# Altium PCB PCB_Testplatine.PcbDoc (part 2 of 3)
Units mm, origin at the board's own origin, x right, y up, seen from the top; angles counter-clockwise.
Board outline 124.77 x 137.35 mm, 2 copper layers (Top Layer, Bottom Layer); 215 components, 185 nets, 1105 pads, 469 vias.
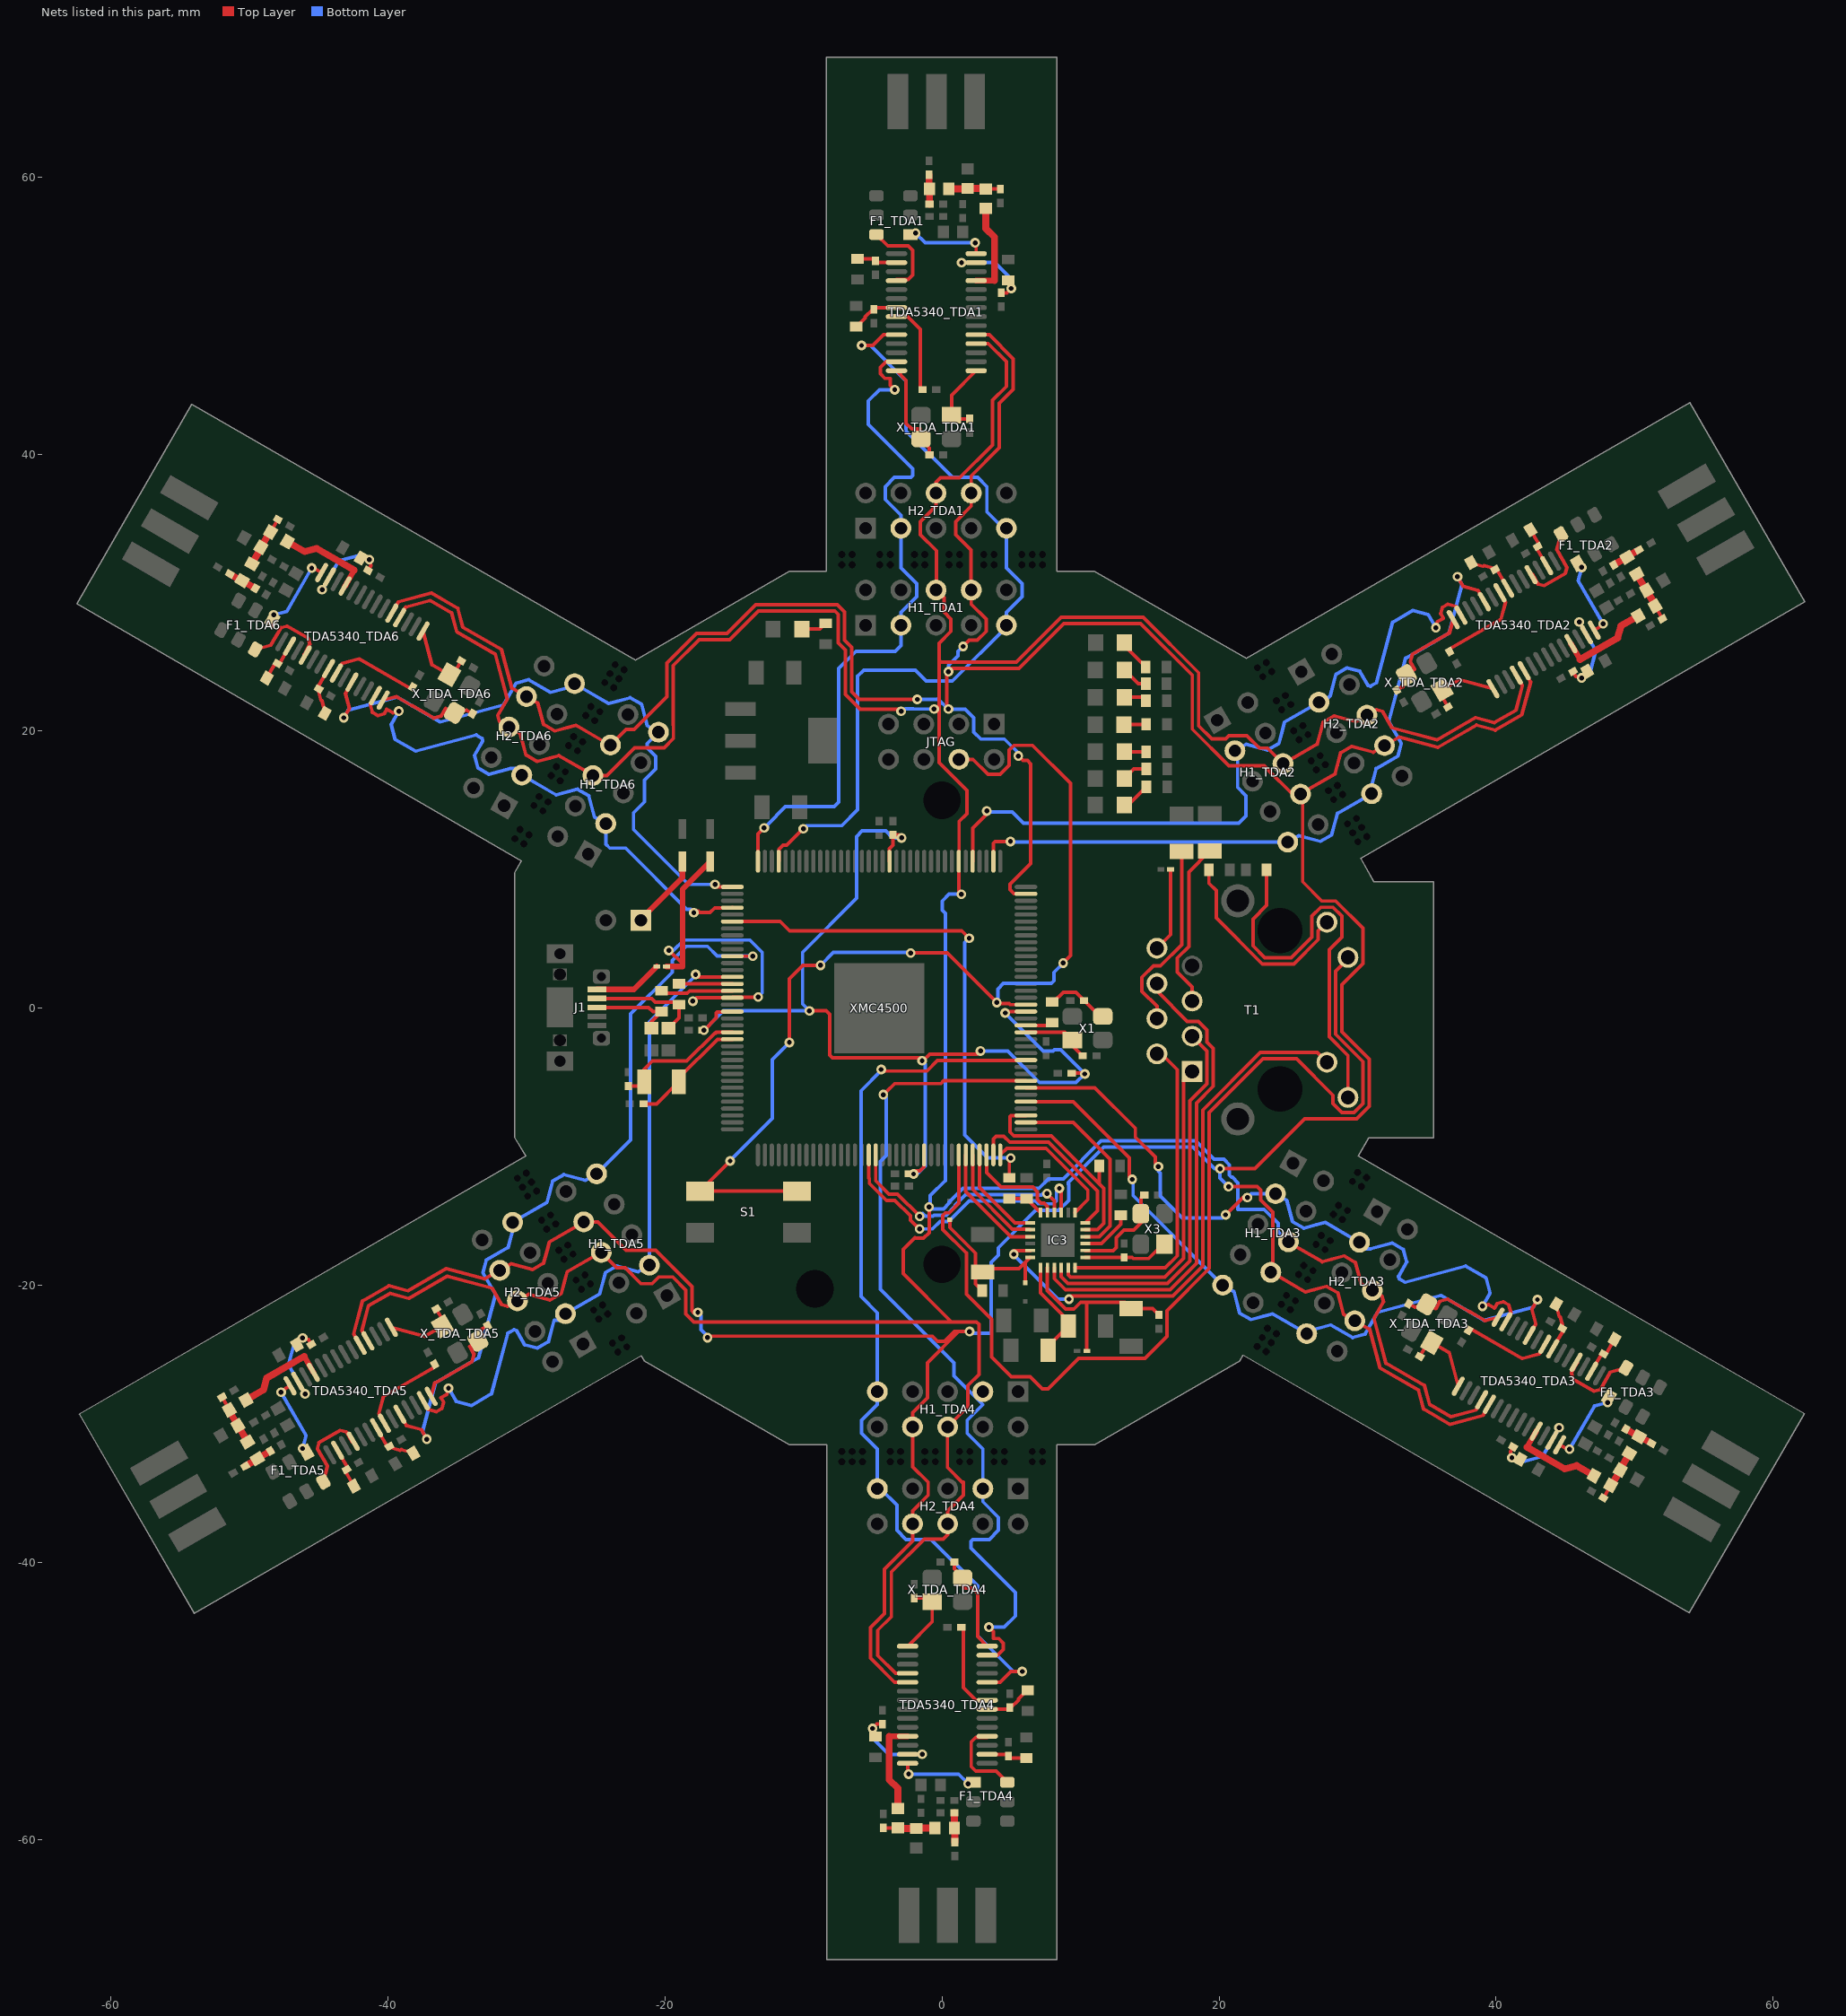
[diagram p2: the nets of this part, all layers, seen from the top]

## Via types
v1: diameter 0.7, hole 0.35, Top Layer to Bottom Layer, 421 vias
v2: diameter 0.5, hole 0.35, Top Layer to Bottom Layer, 36 vias
v3: diameter 2.7, hole 2.5, Top Layer to Bottom Layer, 12 vias

## Nets (pads, with @x,y where several pads share a name; then routed paths per layer and width w, separated by ;. In a path a pad name is that pad's centre, name@x,y a point inside that pad or via, vN(x,y) a via of type N, cw(c..) or ccw(c..) an arc to the next point about the centre after c; other vN are vias at no path point) (continued)
INTRP: R206.2 XMC4500.6 | length 37.5
  Top Layer w0.254: XMC4500.6@-15.15,6.25 -11.697,6.25 -11.017,5.57 1.42,5.57 v1(1.95,5.04) ; R206.2@4.85,-12.25 4.85,-10.92 v1(4.95,-10.82)
  Bottom Layer w0.254: v1(1.95,5.04) 1.641,4.731 1.641,-9.151 3.29,-10.8 4.776,-10.8 4.853,-10.723 v1(4.95,-10.82)
LED1: T1.11 XMC4500.66 | length 75.9
  Top Layer w0.254: XMC4500.66@1.2,-10.6 1.2,-14.091 0.515,-14.776 0.24,-14.776 0.048,-14.968 0.048,-15.982 1.753,-17.687 1.753,-20.643 3.573,-22.463 3.573,-25.185 5.001,-26.613 6.365,-26.613 7.242,-27.49 7.652,-27.49 9.865,-25.277 14.635,-25.277 16.227,-23.685 16.227,-21.846 19.284,-18.789 19.284,-7.548 23.168,-3.664 25.594,-3.664 28.223,-6.293 28.223,-6.896 28.854,-7.527 29.746,-7.527 30.377,-6.896 30.377,-3.86 28.404,-1.887 28.404,2.65 29.3,3.546 T1.11@29.3,3.66
MISO_TDA1: H1_TDA1.8 H1_TDA2.8 H1_TDA3.8 H1_TDA4.8 H1_TDA5.8 H1_TDA6.8 H2_TDA1.8 H2_TDA2.8 H2_TDA3.8 H2_TDA4.8 H2_TDA5.8 H2_TDA6.8 TDA5340_TDA1.19 TDA5340_TDA2.19 TDA5340_TDA3.19 TDA5340_TDA4.19 TDA5340_TDA5.19 TDA5340_TDA6.19 XMC4500.107 | length 353.1
  Top Layer w0.254: TDA5340_TDA5.19@-42.022,-24.341 -42.493,-23.526 -41.857,-21.151 -39.942,-20.045 -38.576,-20.411 -35.792,-18.804 -33.012,-19.549 H2_TDA5.8@-31.942,-18.931 -31.127,-18.461 -29.582,-18.875 -28.771,-18.406 -28.528,-17.501 -28.364,-16.888 H1_TDA5.8@-25.887,-15.458 ; TDA5340_TDA6.19@-39.737,28.515 -39.267,29.331 -36.892,29.967 -34.977,28.861 -34.611,27.495 -31.827,25.888 -31.082,23.108 H2_TDA6.8@-30.012,22.49 -29.197,22.02 -28.783,20.475 -27.972,20.007 -27.067,20.249 -26.454,20.413 H1_TDA6.8@-23.977,18.983 ; H1_TDA5.8@-25.88,-15.431 -24.863,-15.431 -22.81,-17.483 -20.694,-17.483 -18.064,-20.113 -18.064,-21.86 -17.955,-21.97 v1(-17.64,-21.97) ; H1_TDA6.8@-23.95,18.99 -22.827,20.113 -22.234,20.113 -19.864,22.483 -19.864,24.918 -17.726,27.056 -16.737,27.056 -16.729,27.048 -15.525,27.048 -13.454,29.119 -7.557,29.119 -7.051,28.613 -7.051,26.567 -6.519,26.034 -6.519,22.829 -5.98,22.29 v1(-1.8,22.29) ; v1(-16.94,-23.79) -16.83,-23.68 -0.707,-23.68 -0.33,-24.057 0.17,-24.057 0.877,-23.35 1.19,-23.35 ; TDA5340_TDA4.19@-2.495,-48.665 -3.437,-48.665 -5.175,-46.927 -5.175,-44.715 -4.175,-43.715 -4.175,-40.501 -2.14,-38.466 -2.14,-36.289 -1.009,-35.158 -1.009,-34.222 -2.12,-33.111 H1_TDA4.8@-2.12,-30.25 ; H1_TDA4.8@-2.14,-30.23 -2.14,-29.213 -1.063,-28.136 -1.063,-25.603 1.19,-23.35 ; v1(0.46,21.59) 0.43,21.59 0.33,21.69 0.33,24.29 v1(0.46,24.29) ; v1@0.692,24.522 5.224,24.522 5.539,24.522 8.789,27.772 14.32,27.772 18.065,24.028 18.065,20.132 20.694,17.502 23.268,17.502 23.533,17.237 23.533,17.203 25.287,15.45 H1_TDA2.8@25.88,15.45 ; v1(1.51,26.11) 1.963,26.563 2.546,26.563 3.177,27.194 3.177,28.086 2.1,29.163 H1_TDA1.8@2.1,30.18 ; v1(1.98,-23.35) 1.19,-23.35 ; H1_TDA1.8@2.08,30.2 2.08,33.061 0.969,34.172 0.969,35.108 2.1,36.239 H2_TDA1.8@2.1,37.18 2.1,38.416 4.135,40.451 4.135,43.665 5.135,44.665 5.135,46.877 3.397,48.615 TDA5340_TDA1.19@2.455,48.615 ; v1(5.504,18.201) 5.835,17.87 6.15,17.87 6.384,17.636 6.384,17.126 6.381,17.123 6.381,13.175 6.384,13.172 6.384,10.434 4.898,8.948 4.898,8.552 5.177,8.273 6.05,8.273 XMC4500.107@6.05,8.25 ; v1(20.06,-11.59) 22.58,-11.59 26.189,-7.981 29.934,-7.981 30.831,-7.084 30.831,-3.672 28.858,-1.699 28.858,1.695 30.377,3.214 30.377,5.768 28.414,7.731 27.419,7.731 26.027,9.123 H1_TDA2.8@26.027,15.45 ; v1(20.68,-12.89) 22.74,-12.89 22.993,-13.143 22.993,-13.847 23.877,-14.731 23.877,-18.923 H1_TDA3.8@23.73,-19.07 ; H1_TDA3.8@23.757,-19.063 26.234,-20.493 26.847,-20.329 27.752,-20.087 28.563,-20.555 28.977,-22.1 H2_TDA3.8@29.792,-22.57 30.862,-23.188 31.607,-25.968 34.391,-27.575 34.757,-28.941 36.672,-30.047 39.047,-29.411 TDA5340_TDA3.19@39.517,-28.595 ; H1_TDA2.8@25.887,15.477 25.98,15.531 28.365,16.907 28.529,17.52 28.771,18.425 29.583,18.893 31.128,18.479 H2_TDA2.8@31.942,18.95 33.012,19.568 35.792,18.823 38.576,20.43 39.942,20.064 41.857,21.17 42.493,23.544 TDA5340_TDA2.19@42.023,24.36
  Bottom Layer w0.254: v1(-17.64,-21.97) -17.408,-22.202 -17.408,-23.222 -16.94,-23.69 v1(-16.94,-23.79) ; v1(-1.8,22.29) -0.346,22.29 -0.306,22.33 v1@0.447,21.577 ; v1(0.46,24.29) 0.46,24.74 1.147,25.427 1.147,25.747 v1(1.51,26.11) ; v1@0.605,21.577 1.656,21.577 2.287,20.946 2.287,19.933 2.797,19.423 4.497,19.423 5.504,18.416 v1(5.504,18.201) ; v1(1.98,-23.35) 2.095,-23.465 3.531,-23.465 3.531,-18.342 4.049,-17.824 4.049,-17.302 6.74,-14.611 8.4,-14.611 9.137,-13.874 9.137,-12.73 9.12,-12.713 9.12,-12.595 11.671,-10.044 18.124,-10.044 19.67,-11.59 v1(20.06,-11.59) 20.06,-12.27 v1(20.68,-12.89)
MOSI_TDA1: H1_TDA1.6 H1_TDA2.6 H1_TDA3.6 H1_TDA4.6 H1_TDA5.6 H1_TDA6.6 H2_TDA1.6 H2_TDA2.6 H2_TDA3.6 H2_TDA4.6 H2_TDA5.6 H2_TDA6.6 TDA5340_TDA1.18 TDA5340_TDA2.18 TDA5340_TDA3.18 TDA5340_TDA4.18 TDA5340_TDA5.18 TDA5340_TDA6.18 XMC4500.115 | length 343.5
  Top Layer w0.254: TDA5340_TDA5.18@-41.459,-24.016 -41.896,-23.26 -41.421,-21.486 -39.87,-20.59 -38.504,-20.956 -35.72,-19.349 -32.485,-20.216 -31.796,-21.41 -31.359,-21.527 H2_TDA5.6@-30.672,-21.131 -29.857,-20.66 -28.312,-21.074 -27.501,-20.606 -27.258,-19.701 -27.08,-19.034 H1_TDA5.6@-24.637,-17.623 ; TDA5340_TDA6.18@-39.174,28.19 -38.738,28.946 -36.964,29.422 -35.413,28.527 -35.047,27.161 -32.263,25.553 -31.396,22.318 -32.086,21.124 -31.969,20.687 H2_TDA6.6@-31.282,20.291 -30.467,19.82 -30.053,18.275 -29.242,17.807 -28.337,18.049 -27.67,18.228 H1_TDA6.6@-25.227,16.818 ; H1_TDA6.6@-25.22,16.791 -24.203,16.791 -22.196,18.797 -20.08,18.797 -19.403,19.474 -19.403,20.437 -19.41,20.444 -19.41,24.73 -17.538,26.602 -16.925,26.602 -16.917,26.594 -15.337,26.594 -13.266,28.665 -7.745,28.665 -7.505,28.425 -7.505,26.378 -6.973,25.846 -6.973,22.641 -5.909,21.577 -3.107,21.577 v1(-2.96,21.43) ; H1_TDA5.6@-24.61,-17.631 -23.487,-18.753 -22.894,-18.753 -21.757,-19.89 -20.947,-19.89 -20.465,-19.408 -19.46,-19.408 -18.518,-20.35 -18.518,-22.068 -17.93,-22.656 2.482,-22.656 ; TDA5340_TDA4.18@-2.495,-48.015 -3.368,-48.015 -4.667,-46.716 -4.667,-44.926 -3.667,-43.926 -3.667,-40.711 -1.299,-38.343 0.08,-38.343 0.4,-38.023 0.4,-36.289 1.531,-35.158 1.531,-34.222 1.509,-34.244 1.477,-34.244 0.38,-33.147 0.38,-30.25 1.863,-28.767 1.863,-27.244 2.657,-26.45 2.657,-22.831 2.482,-22.656 ; v1(-0.94,-14.35) -0.94,-16.217 -1.34,-16.617 -1.9,-16.617 -1.955,-16.562 -2.816,-17.423 -2.816,-19.166 0.674,-22.656 2.482,-22.656 ; v1@-0.69,21.65 -0.63,21.59 v1(-0.58,21.59) ; -0.166,25.09 -0.052,24.976 5.036,24.976 5.351,24.976 8.601,28.226 14.509,28.226 18.519,24.216 18.519,20.369 19.46,19.427 20.465,19.427 20.694,19.656 22.01,19.656 22.894,18.772 23.487,18.772 H1_TDA2.6@24.61,17.649 ; v1(1.38,8.22) 1.246,8.22 1.2,8.266 XMC4500.115@1.2,10.6 1.223,10.623 1.223,13.483 1.78,14.04 1.78,15.725 -0.22,17.725 -0.22,26.337 0.637,27.194 0.637,28.086 0.133,28.59 0.133,29.647 -0.42,30.2 -0.42,33.021 -1.571,34.172 -1.571,35.108 -0.44,36.239 H2_TDA1.6@-0.44,37.18 -0.44,37.973 -0.12,38.293 1.259,38.293 3.627,40.661 3.627,43.876 4.627,44.876 4.627,46.666 3.328,47.965 TDA5340_TDA1.18@2.455,47.965 ; H1_TDA2.6@24.637,17.642 27.08,19.052 27.259,19.72 27.501,20.625 28.313,21.093 29.858,20.679 H2_TDA2.6@30.672,21.149 31.359,21.546 31.796,21.429 32.485,20.235 35.721,19.368 38.504,20.975 39.87,20.609 41.421,21.504 41.896,23.279 TDA5340_TDA2.18@41.46,24.035 ; H1_TDA3.6@25.007,-16.898 27.45,-18.308 28.117,-18.129 29.022,-17.887 29.833,-18.355 30.247,-19.9 H2_TDA3.6@31.062,-20.371 31.749,-20.767 31.866,-21.204 31.176,-22.398 32.043,-25.633 34.827,-27.241 35.193,-28.607 36.744,-29.502 38.518,-29.026 TDA5340_TDA3.18@38.954,-28.27
  Bottom Layer w0.254: v1(-2.96,21.43) -2.96,21.32 -2.66,21.62 -2.087,21.62 -2.057,21.59 v1(-0.58,21.59) ; v1(1.38,8.22) 0.493,8.22 0.003,7.73 0.003,7.063 0.226,6.84 0.226,-12.447 -0.857,-13.53 -0.857,-14.267 v1(-0.94,-14.35) -0.803,-14.487 0.1,-14.487 0.497,-14.09 0.497,-14.027 1.502,-13.022 6.99,-13.022 7.679,-12.333 8.74,-12.333 11.483,-9.59 18.313,-9.59 19.636,-10.913 20.34,-10.913 20.737,-11.31 20.737,-12.057 20.893,-12.213 20.96,-12.213 21.357,-12.61 21.357,-14.524 23.246,-14.524 24.271,-15.549 24.271,-16.142 H1_TDA3.6@25,-16.871
NetC1_2: C1.2 C2.2 C3.2 C4.2 XMC4500.19 XMC4500.61 XMC4500.90 XMC4500.125 | length 77.2
  Top Layer w0.254: v1(-17.2,-1.6) -17.188,-1.6 -16.302,-0.714 -16.302,-0.335 -16.24,-0.273 XMC4500.19@-15.173,-0.273 ; v1(-9.58,-0.2) -8.38,-0.2 -8.127,-0.453 -8.127,-3.385 -7.935,-3.577 v1@-1.446,-3.577 ; XMC4500.125@-3.8,10.6 -3.8,11.5 -3.55,11.75 C1.2@-3.55,12.5 -3.14,12.5 v1(-2.93,12.29) ; v1@-2.066,-11.996 v1(-2.066,-11.975) ; v1@-2.066,-11.752 -1.602,-11.752 -1.323,-11.473 XMC4500.61@-1.323,-10.623 ; v1(-1.446,-3.8) -1.388,-3.8 -0.907,-3.319 2.549,-3.319 v1(2.772,-3.096) ; v1(4.55,-0.35) 4.65,-0.25 XMC4500.90@6.05,-0.25 ; C2.2@9.35,-4.7 v1@10.25,-4.7 ; v1(10.3,-4.75) v1@10.3,-4.55
  Bottom Layer w0.254: v1(-17.2,-1.6) -15.8,-0.2 v1(-9.58,-0.2) -10.08,0.3 -10.08,4.035 -6.177,7.938 -6.177,12.39 -5.78,12.787 -4.073,12.787 -3.576,12.29 v1(-2.93,12.29) ; v1(-2.066,-11.975) -1.795,-11.975 -1.223,-11.403 -1.223,-4.023 v1(-1.446,-3.8) v1@-1.28,-3.8 ; v1(2.772,-3.096) 4.742,-3.096 7.023,-5.377 9.673,-5.377 v1(10.3,-4.75) 8.55,-3 8.117,-3 8.01,-3.107 7.307,-3.107 v1(4.55,-0.35)
NetC9_2: C9.2 X1.1 XMC4500.87 | length 5
  Top Layer w0.254: XMC4500.87@6.05,-1.75 8.85,-1.75 X1.1@9.4,-2.3 9.4,-2.7 C9.2@10.15,-3.45
NetC10_2: C10.2 R10.2 X1.3 | length 4.5
  Top Layer w0.254: R10.2@7.95,0.45 8.05,0.45 8.75,1.15 9.662,1.15 X1.3@11.412,-0.6
NetC11_2: C11.2 X2.1 XMC4500.22 | length 8.7
  Top Layer w0.254: C11.2@-22.66,-5.63 -21.83,-5.63 X2.1@-21.52,-5.32 ; X2.1@-21.52,-4.42 -20.927,-3.827 -18.436,-3.827 -16.405,-1.796 -16.346,-1.796 -16.3,-1.75 XMC4500.22@-15.15,-1.75
NetC12_2: C12.2 X2.2 XMC4500.23 | length 8.5
  Top Layer w0.254: C12.2@-21.56,-6.91 -20.61,-6.91 X2.2@-19.02,-5.32 -19.02,-5.053 -16.217,-2.25 XMC4500.23@-15.15,-2.25
NetC21_TDA1_1: C21_TDA1.1 R1_TDA1.1 TDA5340_TDA1.7 | length 3.5
  Top Layer w0.254: R1_TDA1.1@-6.22,49.19 -6.17,49.19 -5.551,49.809 -5.551,49.898 -5.009,50.44 C21_TDA1.1@-4.92,50.44 -4.795,50.565 TDA5340_TDA1.7@-3.295,50.565
NetC21_TDA2_1: C21_TDA2.1 R1_TDA2.1 TDA5340_TDA2.7 | length 3.5
  Top Layer w0.254: R1_TDA2.1@38.183,32.16 38.208,32.117 39.054,31.89 39.131,31.935 39.871,31.736 C21_TDA2.1@39.916,31.659 40.086,31.613 TDA5340_TDA2.7@40.836,30.314
NetC21_TDA3_1: C21_TDA3.1 R1_TDA3.1 TDA5340_TDA3.7 | length 3.5
  Top Layer w0.254: TDA5340_TDA3.7@44.081,-24.591 44.831,-23.292 C21_TDA3.1@44.785,-23.121 44.83,-23.044 44.631,-22.303 44.554,-22.259 44.328,-21.413 R1_TDA3.1@44.353,-21.37
NetC21_TDA4_1: C21_TDA4.1 R1_TDA4.1 TDA5340_TDA4.7 | length 3.5
  Top Layer w0.254: TDA5340_TDA4.7@3.255,-50.615 4.755,-50.615 C21_TDA4.1@4.88,-50.49 4.969,-50.49 5.511,-49.948 5.511,-49.859 6.13,-49.24 R1_TDA4.1@6.18,-49.24
NetC21_TDA5_1: C21_TDA5.1 R1_TDA5.1 TDA5340_TDA5.7 | length 3.5
  Top Layer w0.254: TDA5340_TDA5.7@-40.836,-30.296 -40.086,-31.595 C21_TDA5.1@-39.915,-31.64 -39.871,-31.717 -39.13,-31.916 -39.053,-31.871 -38.208,-32.098 R1_TDA5.1@-38.183,-32.141
NetC21_TDA6_1: C21_TDA6.1 R1_TDA6.1 TDA5340_TDA6.7 | length 3.5
  Top Layer w0.254: R1_TDA6.1@-44.573,21.29 -44.548,21.333 -44.774,22.179 -44.851,22.223 -45.05,22.964 C21_TDA6.1@-45.005,23.041 -45.051,23.212 TDA5340_TDA6.7@-44.301,24.511
NetC22_TDA1_1: C22_TDA1.1 R2_TDA1.1 TDA5340_TDA1.2 | length 2.8
  Top Layer w0.254: R2_TDA1.1@-6.12,54.09 -4.97,54.09 C22_TDA1.1@-4.82,53.94 ; C22_TDA1.1@-4.695,53.815 TDA5340_TDA1.2@-3.295,53.815
NetC22_TDA2_1: C22_TDA2.1 R2_TDA2.1 TDA5340_TDA2.2 | length 2.8
  Top Layer w0.254: R2_TDA2.1@42.477,34.523 43.052,33.528 C22_TDA2.1@42.997,33.323 ; C22_TDA2.1@42.951,33.152 TDA5340_TDA2.2@43.651,31.939
NetC22_TDA3_1: C22_TDA3.1 R2_TDA3.1 TDA5340_TDA3.2 | length 2.8
  Top Layer w0.254: TDA5340_TDA3.2@46.896,-26.216 C22_TDA3.1@47.596,-25.003 ; C22_TDA3.1@47.766,-24.957 47.971,-24.902 R2_TDA3.1@48.546,-23.907
NetC22_TDA4_1: C22_TDA4.1 R2_TDA4.1 TDA5340_TDA4.2 | length 2.8
  Top Layer w0.254: TDA5340_TDA4.2@3.255,-53.865 C22_TDA4.1@4.655,-53.865 ; C22_TDA4.1@4.78,-53.99 4.93,-54.14 R2_TDA4.1@6.08,-54.14
NetC22_TDA5_1: C22_TDA5.1 R2_TDA5.1 TDA5340_TDA5.2 | length 2.8
  Top Layer w0.254: TDA5340_TDA5.2@-43.651,-31.921 C22_TDA5.1@-42.951,-33.133 ; C22_TDA5.1@-42.996,-33.304 -43.051,-33.509 R2_TDA5.1@-42.476,-34.505
NetC22_TDA6_1: C22_TDA6.1 R2_TDA6.1 TDA5340_TDA6.2 | length 2.8
  Top Layer w0.254: R2_TDA6.1@-48.766,23.827 -48.191,24.822 C22_TDA6.1@-47.986,24.877 ; C22_TDA6.1@-47.816,24.923 TDA5340_TDA6.2@-47.116,26.136
NetC23_TDA1_1: C23_TDA1.1 R3_TDA1.1 TDA5340_TDA1.27 | length 6
  Top Layer w0.254: C23_TDA1.1@4.27,51.64 4.68,51.64 v1(4.99,51.95) R3_TDA1.1@4.99,52.32
  Bottom Layer w0.254: v1(1.403,53.815) 3.805,53.815 4.99,52.63 v1(4.99,51.95)
NetC23_TDA2_1: C23_TDA2.1 R3_TDA2.1 TDA5340_TDA2.27 | length 6
  Top Layer w0.254: C23_TDA2.1@45.55,24.3 45.755,23.945 v1(46.178,23.832) R3_TDA2.1@46.499,24.017
  Bottom Layer w0.254: v1(46,27.871) 47.201,25.791 46.767,24.172 v1(46.178,23.832)
NetC23_TDA3_1: C23_TDA3.1 R3_TDA3.1 TDA5340_TDA3.27 | length 6
  Top Layer w0.254: C23_TDA3.1@41.23,-31.68 41.025,-32.035 v1(41.138,-32.458) R3_TDA3.1@41.458,-32.643
  Bottom Layer w0.254: v1(41.138,-32.458) 41.727,-32.798 43.346,-32.364 v1(44.547,-30.284)
NetC23_TDA4_1: C23_TDA4.1 R3_TDA4.1 TDA5340_TDA4.27 | length 6
  Top Layer w0.254: R3_TDA4.1@-5.03,-52.37 v1(-5.03,-52) -4.72,-51.69 C23_TDA4.1@-4.31,-51.69
  Bottom Layer w0.254: v1(-5.03,-52) -5.03,-52.68 -3.845,-53.865 v1(-1.443,-53.865)
NetC23_TDA5_1: C23_TDA5.1 R3_TDA5.1 TDA5340_TDA5.27 | length 6
  Top Layer w0.254: R3_TDA5.1@-46.498,-23.998 v1(-46.178,-23.813) -45.755,-23.927 C23_TDA5.1@-45.55,-24.282
  Bottom Layer w0.254: v1(-46.178,-23.813) -46.767,-24.153 -47.201,-25.772 v1(-46,-27.852)
NetC23_TDA6_1: C23_TDA6.1 R3_TDA6.1 TDA5340_TDA6.27 | length 6
  Top Layer w0.254: R3_TDA6.1@-41.678,32.563 v1(-41.358,32.378) -41.245,31.955 C23_TDA6.1@-41.45,31.6
  Bottom Layer w0.254: v1(-44.767,30.204) -43.566,32.284 -41.947,32.718 v1(-41.358,32.378)
NetC24_TDA1_1: C24_TDA1.1 TDA5340_TDA1.8 | length 6.5
  Top Layer w0.254: TDA5340_TDA1.8@-3.295,49.915 -2.49,49.915 -1.585,49.01 -1.585,44.805 C24_TDA1.1@-1.42,44.64
NetC24_TDA2_1: C24_TDA2.1 TDA5340_TDA2.8 | length 6.5
  Top Layer w0.254: C24_TDA2.1@36.643,25.728 36.703,25.954 40.345,28.056 40.676,29.292 TDA5340_TDA2.8@40.274,29.989
NetC24_TDA3_1: C24_TDA3.1 TDA5340_TDA3.8 | length 6.5
  Top Layer w0.254: C24_TDA3.1@38.012,-23.252 38.238,-23.191 41.879,-25.294 43.116,-24.963 TDA5340_TDA3.8@43.518,-24.266
NetC24_TDA4_1: C24_TDA4.1 TDA5340_TDA4.8 | length 6.5
  Top Layer w0.254: C24_TDA4.1@1.38,-44.69 1.545,-44.855 1.545,-49.06 2.45,-49.965 TDA5340_TDA4.8@3.255,-49.965
NetC24_TDA5_1: C24_TDA5.1 TDA5340_TDA5.8 | length 6.5
  Top Layer w0.254: TDA5340_TDA5.8@-40.273,-29.971 -40.676,-29.274 -40.344,-28.037 -36.703,-25.935 C24_TDA5.1@-36.642,-25.709
NetC24_TDA6_1: C24_TDA6.1 TDA5340_TDA6.8 | length 6.5
  Top Layer w0.254: TDA5340_TDA6.8@-43.738,24.186 -43.336,24.883 -42.099,25.214 -38.458,23.111 C24_TDA6.1@-38.232,23.172
NetC25_TDA1_1: C25_TDA1.1 TDA5340_TDA1.15 X_TDA_TDA1.1 | length 5.4
  Top Layer w0.254: C25_TDA1.1@1.98,42.54 0.93,42.54 X_TDA_TDA1.1@0.68,42.79 0.68,44.24 TDA5340_TDA1.15@2.455,46.015
NetC25_TDA2_1: C25_TDA2.1 TDA5340_TDA2.15 X_TDA_TDA2.1 | length 5.4
  Top Layer w0.254: C25_TDA2.1@36.524,21.734 35.999,22.643 X_TDA_TDA2.1@36.091,22.984 37.346,23.709 TDA5340_TDA2.15@39.771,23.06
NetC25_TDA3_1: C25_TDA3.1 TDA5340_TDA3.15 X_TDA_TDA3.1 | length 5.4
  Top Layer w0.254: C25_TDA3.1@34.494,-25.146 35.019,-24.237 X_TDA_TDA3.1@35.36,-24.146 36.616,-24.871 TDA5340_TDA3.15@37.266,-27.295
NetC25_TDA4_1: C25_TDA4.1 TDA5340_TDA4.15 X_TDA_TDA4.1 | length 5.4
  Top Layer w0.254: TDA5340_TDA4.15@-2.495,-46.065 -0.72,-44.29 -0.72,-42.84 -0.97,-42.59 C25_TDA4.1@-2.02,-42.59
NetC25_TDA5_1: C25_TDA5.1 TDA5340_TDA5.15 X_TDA_TDA5.1 | length 5.4
  Top Layer w0.254: TDA5340_TDA5.15@-39.771,-23.041 -37.346,-23.691 X_TDA_TDA5.1@-36.09,-22.966 -35.999,-22.624 C25_TDA5.1@-36.524,-21.715
NetC25_TDA6_1: C25_TDA6.1 TDA5340_TDA6.15 X_TDA_TDA6.1 | length 5.4
  Top Layer w0.254: TDA5340_TDA6.15@-37.486,27.215 -36.836,24.791 -35.58,24.066 -35.239,24.157 C25_TDA6.1@-34.714,25.066
NetC26_TDA1_2: C26_TDA1.2 TDA5340_TDA1.14 X_TDA_TDA1.3 | length 7.4
  Top Layer w0.254: TDA5340_TDA1.14@-3.295,46.015 -2.601,45.321 -2.601,45.266 -2.609,45.258 -2.609,44.022 -2.601,44.014 -2.601,42.208 -2.202,41.809 -1.57,41.809 -1.57,41.09 -0.92,40.44 C26_TDA1.2@-0.92,39.94
NetC26_TDA2_2: C26_TDA2.2 TDA5340_TDA2.14 X_TDA_TDA2.3 | length 7.4
  Top Layer w0.254: C26_TDA2.2@32.822,22.945 33.255,23.195 33.493,24.083 34.116,24.443 33.8,24.99 33.946,25.535 35.51,26.438 35.513,26.449 36.584,27.067 36.595,27.064 36.642,27.091 TDA5340_TDA2.14@36.896,28.039
NetC26_TDA3_2: C26_TDA3.2 TDA5340_TDA3.14 X_TDA_TDA3.3 | length 7.4
  Top Layer w0.254: C26_TDA3.2@33.692,-21.335 34.125,-21.585 35.013,-21.347 35.636,-21.706 35.952,-21.159 36.497,-21.013 38.061,-21.916 38.072,-21.913 39.142,-22.531 39.145,-22.542 39.193,-22.57 TDA5340_TDA3.14@40.141,-22.316
NetC26_TDA4_2: C26_TDA4.2 TDA5340_TDA4.14 X_TDA_TDA4.3 | length 7.4
  Top Layer w0.254: C26_TDA4.2@0.88,-39.99 0.88,-40.49 1.53,-41.14 1.53,-41.859 2.162,-41.859 2.561,-42.258 2.561,-44.064 2.569,-44.072 2.569,-45.308 2.561,-45.316 2.561,-45.371 TDA5340_TDA4.14@3.255,-46.065
NetC26_TDA5_2: C26_TDA5.2 TDA5340_TDA5.14 X_TDA_TDA5.3 | length 7.4
  Top Layer w0.254: TDA5340_TDA5.14@-36.896,-28.021 -36.642,-27.073 -36.594,-27.045 -36.583,-27.048 -35.513,-26.43 -35.51,-26.419 -33.946,-25.516 -33.8,-24.971 -34.116,-24.424 -33.493,-24.064 -33.255,-23.176 C26_TDA5.2@-32.822,-22.926
NetC26_TDA6_2: C26_TDA6.2 TDA5340_TDA6.14 X_TDA_TDA6.3 | length 7.4
  Top Layer w0.254: TDA5340_TDA6.14@-40.361,22.236 -39.413,22.49 -39.365,22.462 -39.362,22.451 -38.292,21.833 -38.281,21.836 -36.717,20.933 -36.172,21.079 -35.856,21.626 -35.233,21.267 -34.345,21.505 C26_TDA6.2@-33.912,21.255
NetC29_TDA1_1: C29_TDA1.1 C31_TDA1.1 L4_TDA1.2 | length 2.1
  Top Layer w0.5: L4_TDA1.2@-0.95,59.17 C31_TDA1.1@-0.95,60.16 ; C29_TDA1.1@-0.92,58.04 L4_TDA1.2@-0.92,59.14
NetC29_TDA2_1: C29_TDA2.1 C31_TDA2.1 L4_TDA2.2 | length 2.1
  Top Layer w0.5: C29_TDA2.1@48.497,31.995 L4_TDA2.2@49.45,32.545 ; L4_TDA2.2@49.461,32.586 C31_TDA2.1@50.318,33.081
NetC29_TDA3_1: C29_TDA3.1 C31_TDA3.1 L4_TDA3.2 | length 2.1
  Top Layer w0.5: C29_TDA3.1@49.367,-30.385 L4_TDA3.2@50.32,-30.935 ; L4_TDA3.2@50.361,-30.924 C31_TDA3.1@51.218,-31.419
NetC29_TDA4_1: C29_TDA4.1 C31_TDA4.1 L4_TDA4.2 | length 2.1
  Top Layer w0.5: L4_TDA4.2@0.88,-59.19 C29_TDA4.1@0.88,-58.09 ; C31_TDA4.1@0.91,-60.21 L4_TDA4.2@0.91,-59.22
NetC29_TDA5_1: C29_TDA5.1 C31_TDA5.1 L4_TDA5.2 | length 2.1
  Top Layer w0.5: C31_TDA5.1@-50.318,-33.062 L4_TDA5.2@-49.461,-32.567 ; L4_TDA5.2@-49.45,-32.526 C29_TDA5.1@-48.497,-31.976
NetC29_TDA6_1: C29_TDA6.1 C31_TDA6.1 L4_TDA6.2 | length 2.1
  Top Layer w0.5: C31_TDA6.1@-51.438,31.339 L4_TDA6.2@-50.581,30.844 ; L4_TDA6.2@-50.54,30.855 C29_TDA6.1@-49.587,30.305
NetC30_TDA1_2: C30_TDA1.2 L2_TDA1.1 L3_TDA1.2 L4_TDA1.1 | length 3.7
  Top Layer w0.254: L2_TDA1.1@1.81,59.14 L2_TDA1.1@1.84,59.17 ; L3_TDA1.2@3.15,59.13 C30_TDA1.2@4.19,59.13
  Top Layer w0.5: L4_TDA1.1@0.48,59.14 L2_TDA1.1@1.81,59.14 ; L2_TDA1.1@1.84,59.17 L3_TDA1.2@3.11,59.17
NetC30_TDA2_2: C30_TDA2.2 L2_TDA2.1 L3_TDA2.2 L4_TDA2.1 | length 3.7
  Top Layer w0.254: L2_TDA2.1@50.815,30.181 L2_TDA2.1@50.856,30.17 ; L3_TDA2.2@51.476,29.015 C30_TDA2.2@51.996,28.115
  Top Layer w0.5: L4_TDA2.1@50.15,31.333 L2_TDA2.1@50.815,30.181 ; L2_TDA2.1@50.856,30.17 L3_TDA2.2@51.491,29.07
NetC30_TDA3_2: C30_TDA3.2 L2_TDA3.1 L3_TDA3.2 L4_TDA3.1 | length 3.7
  Top Layer w0.254: C30_TDA3.2@47.756,-35.355 L3_TDA3.2@48.276,-34.455 ; L2_TDA3.1@48.955,-33.299 L2_TDA3.1@48.966,-33.34
  Top Layer w0.5: L3_TDA3.2@48.331,-34.44 L2_TDA3.1@48.966,-33.34 ; L2_TDA3.1@48.955,-33.299 L4_TDA3.1@49.62,-32.147
NetC30_TDA4_2: C30_TDA4.2 L2_TDA4.1 L3_TDA4.2 L4_TDA4.1 | length 3.7
  Top Layer w0.254: C30_TDA4.2@-4.23,-59.18 L3_TDA4.2@-3.19,-59.18 ; L2_TDA4.1@-1.88,-59.22 L2_TDA4.1@-1.85,-59.19
  Top Layer w0.5: L3_TDA4.2@-3.15,-59.22 L2_TDA4.1@-1.88,-59.22 ; L2_TDA4.1@-1.85,-59.19 L4_TDA4.1@-0.52,-59.19
NetC30_TDA5_2: C30_TDA5.2 L2_TDA5.1 L3_TDA5.2 L4_TDA5.1 | length 3.7
  Top Layer w0.254: C30_TDA5.2@-51.996,-28.096 L3_TDA5.2@-51.476,-28.997 ; L2_TDA5.1@-50.856,-30.151 L2_TDA5.1@-50.815,-30.162
  Top Layer w0.5: L3_TDA5.2@-51.491,-29.051 L2_TDA5.1@-50.856,-30.151 ; L2_TDA5.1@-50.815,-30.162 L4_TDA5.1@-50.15,-31.314
NetC30_TDA6_2: C30_TDA6.2 L2_TDA6.1 L3_TDA6.2 L4_TDA6.1 | length 3.7
  Top Layer w0.254: L2_TDA6.1@-49.186,33.26 L2_TDA6.1@-49.175,33.219 ; L3_TDA6.2@-48.496,34.375 C30_TDA6.2@-47.976,35.275
  Top Layer w0.5: L4_TDA6.1@-49.84,32.067 L2_TDA6.1@-49.175,33.219 ; L2_TDA6.1@-49.186,33.26 L3_TDA6.2@-48.551,34.36
NetC201_2: C201.2 C208.2 IC3.2 L200.1 | length 14.1
  Top Layer w0.254: IC3.2@7.6,-18.75 7.6,-20.406 8.92,-21.726 9.517,-21.726 10,-21.243 13.193,-21.243 C208.2@13.65,-21.7 15.2,-21.7 C201.2@15.65,-22.15 ; L200.1@10.45,-24.75 10.45,-21.443
NetC202_2: C202.2 C207.2 IC3.1 | length 6.5
  Top Layer w0.254: IC3.1@7.1,-18.75 7.1,-20.548 C207.2@8.732,-22.18 ; C202.2@7.65,-24.7 7.65,-24.4 C207.2@9.1,-22.95
NetC203_2: C203.2 T1.4 | length 14
  Top Layer w0.254: T1.4@15.51,-0.76 15.51,0.14 14.433,1.217 14.433,2.226 15.257,3.05 15.763,3.05 17.29,4.577 C203.2@17.29,11.31
NetC204_2: C204.2 T1.5 | length 12.2
  Top Layer w0.254: T1.5@18.05,0.51 18.05,1.527 16.973,2.604 16.973,3.618 17.81,4.455 17.81,9.82 C204.2@19.32,11.33
NetC205_2: C205.2 IC3.7 X3.1 | length 6.2
  Top Layer w0.254: IC3.7@10.35,-18 13.713,-18 13.79,-18.077 14.91,-18.077 15.937,-17.05 X3.1@16.05,-17.05
NetC206_2: C206.2 IC3.8 X3.3 | length 7.4
  Top Layer w0.254: IC3.8@10.35,-17.5 12.35,-17.5 12.573,-17.277 12.573,-16.565 13.115,-16.023 13.827,-16.023 14.35,-15.5 X3.3@14.35,-14.85 14.35,-13.7 C206.2@14.6,-13.45
NetC210_2: C210.2 D200.2 D201.2 IC3.24 R202.1 | length 11.1
  Top Layer w0.254: D200.2@0.55,-15.278 0.55,-15.842 2.4,-17.692 2.4,-19.9 R202.1@2.9,-20.4 ; C210.2@3.18,-18.8 5.55,-18.8 6,-18.35 ; D201.2@6,-19.822 6,-18.35 ; IC3.24@6.35,-18 6,-18.35
NetD1_2: D1.2 L11.1 XMC4500.17 | length 26.9
  Top Layer w0.254: v1(-19.74,4.16) -19.74,4.19 -18.75,3.2 -18.7,3.15 -18.8,3.05 -18.75,3 ; v1(-18,0.5) -17.75,0.75 XMC4500.17@-15.15,0.75 ; XMC4500.17@-15.127,0.773 -13.307,0.773 v1(-13.28,0.8)
  Top Layer w0.4: L11.1@-19.9,3 -18.75,3 -18.75,3.2 -18.75,8.575 D1.2@-16.75,10.575
  Bottom Layer w0.254: v1(-19.74,4.16) -19.412,4.16 -18.657,4.915 -13.878,4.915 -12.99,4.027 -12.99,1.09 v1(-13.28,0.8)
NetD2_2: D2.2 J1.2 R12.2 | length 8.1
  Top Layer w0.254: J1.2@-24.925,0.7 -20.98,0.7 -20.707,0.427 -19.177,0.427 R12.2@-19,0.25 -19,-0.7 D2.2@-19.75,-1.45
NetD3_2: D3.2 J1.3 R13.2 | length 6.3
  Top Layer w0.254: J1.3@-24.925,0.05 -21.19,0.05 -20.89,-0.25 R13.2@-20.25,-0.25 -21,-1 D3.2@-21,-1.45
NetD4_1: D4.1 R20.1 | length 2.4
  Top Layer w0.254: D4.1@13.17,26.38 13.17,26.16 R20.1@14.7,24.63
NetD5_1: D5.1 R21.1 | length 2
  Top Layer w0.254: D5.1@13.16,24.42 14.17,23.41 R21.1@14.71,23.41
NetD6_1: D6.1 R22.1 | length 1.7
  Top Layer w0.254: D6.1@13.15,22.44 14.47,22.44 R22.1@14.72,22.19
NetD7_1: D7.1 R23.1 | length 1.6
  Top Layer w0.254: D7.1@13.14,20.47 14.71,20.47 R23.1@14.73,20.49
NetD8_1: D8.1 R24.1 | length 1.6
  Top Layer w0.254: D8.1@13.15,18.5 14.72,18.5 R24.1@14.73,18.51
NetD9_1: D9.1 R25.1 | length 1.9
  Top Layer w0.254: D9.1@13.16,16.57 13.851,17.26 R25.1@14.75,17.26
NetD10_1: D10.1 R26.1 | length 2.1
  Top Layer w0.254: D10.1@13.16,14.65 13.42,14.65 R26.1@14.75,15.98
NetD11_2: D11.2 H3.1 | length 5.5
  Top Layer w0.4: H3.1@-21.75,6.34 -21.75,6.424 -18.76,9.414 D11.2@-18.76,10.575
NetF1_TDA1_1: F1_TDA1.1@-2.295,55.84 TDA5340_TDA1.28 | length 5.9
  Top Layer w0.254: F1_TDA1.1@-2.295,55.84 -2.395,55.94 v1(-1.92,55.94) ; TDA5340_TDA1.28@2.455,54.465 v1@2.455,55.175
  Bottom Layer w0.254: v1(-1.92,55.94) -1.23,55.25 v1(2.38,55.25)
NetF1_TDA1_6: F1_TDA1.6 TDA5340_TDA1.4 | length 6.2
  Top Layer w0.254: F1_TDA1.6@-4.745,55.84 -3.926,55.021 -2.465,55.021 -2.139,54.695 -2.139,52.935 -2.465,52.609 -3.295,52.609 TDA5340_TDA1.4@-3.295,52.515
NetF1_TDA2_1: F1_TDA2.1@45.905,32.086 TDA5340_TDA2.28 | length 5.9
  Top Layer w0.254: F1_TDA2.1@45.905,32.086 45.941,32.222 v1(46.179,31.811) ; TDA5340_TDA2.28@47.089,27.285 v1@47.704,27.64
  Bottom Layer w0.254: v1(46.179,31.811) 45.926,30.869 v1(47.731,27.742)
NetF1_TDA2_6: F1_TDA2.6 TDA5340_TDA2.4 | length 6.2
  Top Layer w0.254: TDA5340_TDA2.4@42.525,31.289 42.607,31.336 43.022,30.617 43.467,30.498 44.991,31.378 45.111,31.823 44.38,33.089 F1_TDA2.6@44.68,34.208
NetF1_TDA3_1: F1_TDA3.1@48.149,-28.094 TDA5340_TDA3.28 | length 5.9
  Top Layer w0.254: TDA5340_TDA3.28@44.584,-31.52 v1@45.198,-31.875 ; v1(48.048,-28.469) 48.286,-28.058 F1_TDA3.1@48.149,-28.094
  Bottom Layer w0.254: v1(45.301,-31.848) 47.106,-28.721 v1(48.048,-28.469)
NetF1_TDA3_6: F1_TDA3.6 TDA5340_TDA3.4 | length 6.2
  Top Layer w0.254: TDA5340_TDA3.4@45.77,-25.566 45.851,-25.613 45.436,-26.332 45.555,-26.777 47.08,-27.657 47.525,-27.538 48.256,-26.272 F1_TDA3.6@49.374,-25.972
NetF1_TDA4_1: F1_TDA4.1@2.255,-55.89 TDA5340_TDA4.28 | length 5.9
  Top Layer w0.254: v1@-2.495,-55.225 TDA5340_TDA4.28@-2.495,-54.515 ; v1(1.88,-55.99) 2.355,-55.99 F1_TDA4.1@2.255,-55.89
  Bottom Layer w0.254: v1(-2.42,-55.3) 1.19,-55.3 v1(1.88,-55.99)
NetF1_TDA4_6: F1_TDA4.6 TDA5340_TDA4.4 | length 6.2
  Top Layer w0.254: TDA5340_TDA4.4@3.255,-52.565 3.255,-52.659 2.425,-52.659 2.099,-52.985 2.099,-54.745 2.425,-55.071 3.886,-55.071 F1_TDA4.6@4.705,-55.89
NetF1_TDA5_1: F1_TDA5.1@-45.904,-32.067 TDA5340_TDA5.28 | length 5.9
  Top Layer w0.254: v1@-47.703,-27.621 TDA5340_TDA5.28@-47.089,-27.266 ; v1(-46.178,-31.792) -45.941,-32.204 F1_TDA5.1@-45.904,-32.067
  Bottom Layer w0.254: v1(-47.731,-27.723) -45.926,-30.85 v1(-46.178,-31.792)
NetF1_TDA5_6: F1_TDA5.6 TDA5340_TDA5.4 | length 6.2
  Top Layer w0.254: F1_TDA5.6@-44.679,-34.189 -44.38,-33.07 -45.11,-31.805 -44.991,-31.36 -43.466,-30.479 -43.021,-30.599 -42.606,-31.318 TDA5340_TDA5.4@-42.525,-31.271
NetF1_TDA6_1: F1_TDA6.1@-48.369,28.014 TDA5340_TDA6.28 | length 5.9
  Top Layer w0.254: F1_TDA6.1@-48.369,28.014 -48.506,27.978 v1(-48.268,28.389) ; v1@-45.418,31.795 TDA5340_TDA6.28@-44.804,31.44
  Bottom Layer w0.254: v1(-48.268,28.389) -47.326,28.641 v1(-45.521,31.768)
NetF1_TDA6_6: F1_TDA6.6 TDA5340_TDA6.4 | length 6.2
  Top Layer w0.254: F1_TDA6.6@-49.594,25.892 -48.476,26.192 -47.745,27.458 -47.3,27.577 -45.775,26.697 -45.656,26.252 -46.071,25.533 TDA5340_TDA6.4@-45.99,25.486
NetIC3_3: IC3.3 T1.6 | length 35.7
  Top Layer w0.254: IC3.3@8.1,-18.75 8.1,-19.534 8.901,-20.335 16.454,-20.335 18.37,-18.419 18.37,-6.854 19.581,-5.643 19.581,-2.919 19.127,-2.465 19.127,-1.584 18.496,-0.953 17.703,-0.953 15.51,1.24 T1.6@15.51,1.78 T1.6@15.059,1.329
NetIC3_4: IC3.4 T1.3 | length 28.3
  Top Layer w0.254: IC3.4@8.6,-18.75 8.6,-19.392 9.089,-19.881 16.266,-19.881 17.885,-18.262 17.885,-6.697 19.127,-5.455 19.127,-3.107 T1.3@18.05,-2.03
  Bottom Layer w0.254: T1.3@17.855,-2.225 T1.3@18.05,-2.03
NetIC3_5: IC3.5 T1.1 | length 23.5
  Top Layer w0.254: IC3.5@9.1,-18.75 9.1,-19.25 9.277,-19.427 16.077,-19.427 17.431,-18.073 17.431,-5.189 T1.1@18.05,-4.57 T1.1@17.855,-4.375
NetIC3_6: IC3.6 T1.2 | length 23.1
  Top Layer w0.254: IC3.6@9.6,-18.75 16.112,-18.75 16.977,-17.885 16.977,-5.459 16.973,-5.455 16.973,-4.443 15.83,-3.3 T1.2@15.51,-3.3
NetIC3_9: IC3.9 R205.2 | length 3.8
  Top Layer w0.254: IC3.9@10.35,-17 11.496,-17 12.9,-15.595 R205.2@12.9,-14.95
NetIC3_10: IC3.10 XMC4500.74 | length 14.1
  Top Layer w0.254: XMC4500.74@6.05,-8.25 9.462,-8.25 12.123,-10.911 12.123,-15.73 11.353,-16.5 IC3.10@10.35,-16.5
NetIC3_11: IC3.11 R204.1 XMC4500.75 | length 16.1
  Top Layer w0.254: XMC4500.75@6.05,-7.75 6.027,-7.773 4.96,-7.773 4.898,-7.835 4.898,-8.948 5.177,-9.227 7.881,-9.227 11.35,-12.696 ; IC3.11@10.35,-16 11.211,-16 11.669,-15.542 11.669,-13.015 11.35,-12.696 ; R204.1@11.35,-11.4 11.35,-12.696
NetIC3_12: IC3.12 XMC4500.71 | length 13
  Top Layer w0.254: XMC4500.71@3.7,-10.6 3.7,-9.45 3.9,-9.25 4.45,-9.25 4.881,-9.681 7.693,-9.681 11.215,-13.203 11.215,-14.635 IC3.12@10.35,-15.5
NetIC3_13: IC3.13 XMC4500.72 | length 9.7
  Top Layer w0.254: XMC4500.72@4.2,-10.6 4.665,-10.135 7.505,-10.135 10.52,-13.15 10.52,-13.83 IC3.13@9.6,-14.75
NetIC3_15: IC3.15 XMC4500.53 | length 21.1
  Top Layer w0.254: XMC4500.53@-5.3,-10.6 -5.3,-12.26 -5.254,-12.306 -5.254,-12.65 -4.023,-13.881 -3.411,-13.881 -2.297,-14.995 -2.297,-15.31 -1.9,-15.707 -1.853,-15.707 v1(-1.62,-15.94) v1@-1.55,-15.94 ; v1(8.46,-13.01) 8.438,-13.01 8.378,-13.07 8.6,-13.292 IC3.15@8.6,-14.75
  Bottom Layer w0.254: v1(-1.62,-15.94) -0.711,-15.94 -0.166,-15.395 0.477,-15.395 1.941,-13.93 6.739,-13.93 6.937,-14.128 8.027,-14.128 8.25,-13.905 8.25,-13.22 v1(8.46,-13.01)
NetIC3_16: IC3.16 XMC4500.54 | length 17.8
  Top Layer w0.254: XMC4500.54@-4.8,-10.6 -4.8,-12.462 -3.835,-13.427 -3.223,-13.427 v1(-1.62,-15.03) ; v1(7.573,-13.396) 8.1,-13.923 IC3.16@8.1,-14.75
  Bottom Layer w0.254: v1(-1.62,-15.03) -1.419,-14.829 -1.22,-15.027 -0.66,-15.027 -0.574,-14.941 0.288,-14.941 0.951,-14.278 0.951,-14.215 1.69,-13.476 6.927,-13.476 6.934,-13.483 7.171,-13.483 7.258,-13.396 v1(7.573,-13.396)
NetIC3_17: IC3.17 XMC4500.70 | length 7.4
  Top Layer w0.254: XMC4500.70@3.223,-10.623 3.223,-11.885 4.265,-12.927 6.539,-12.927 6.877,-13.265 6.877,-13.807 7.143,-14.073 7.36,-14.073 7.6,-14.313 IC3.17@7.6,-14.75
NetIC3_18: IC3.18 R203.1 R206.1 | length 2.7
  Top Layer w0.254: R206.1@4.85,-13.75 R203.1@6.1,-13.75 IC3.18@7.1,-14.75
NetIC3_19: IC3.19 XMC4500.69 | length 7.1
  Top Layer w0.254: XMC4500.69@2.7,-10.6 2.7,-12.95 5.25,-15.5 IC3.19@6.35,-15.5
NetIC3_20: IC3.20 XMC4500.68 | length 7.8
  Top Layer w0.254: XMC4500.68@2.2,-10.6 2.2,-13.092 5.062,-15.954 6.304,-15.954 IC3.20@6.35,-16
NetIC3_21: IC3.21 XMC4500.67 | length 8.6
  Top Layer w0.254: XMC4500.67@1.7,-10.6 1.7,-13.234 4.966,-16.5 IC3.21@6.35,-16.5
NetIC3_23: IC3.23 T1.10 | length 39.8
  Top Layer w0.254: v1(5.18,-17.77) 5.18,-17.53 5.15,-17.5 IC3.23@6.35,-17.5 ; v1(9.163,-21.012) 9.163,-20.963 9.338,-20.789 16.642,-20.789 18.83,-18.601 18.83,-7.36 22.98,-3.21 27.08,-3.21 T1.10@27.78,-3.91
  Bottom Layer w0.254: v1(5.18,-17.77) 5.18,-17.83 8.362,-21.012 v1(9.163,-21.012) ; T1.10@27.78,-3.91 T1.10@27.78,-3.888
NetJ1_1: J1.1 L11.2 | length 5
  Top Layer w0.4: J1.1@-24.925,1.35 -22.25,1.35 L11.2@-20.6,3
NetJTAG_4: JTAG.4 S1.1 S1.2 XMC4500.91 | length 75.6
  Top Layer w0.254: v1(-15.305,-11.035) S1.1@-17.485,-13.215 S1.2@-10.485,-13.215 ; v1(-11.035,-2.48) -11.035,2.115 -10.06,3.09 v1(-8.78,3.09) ; v1(-2.275,3.98) 0.36,3.98 ; 0.365,3.985 v1(3.95,0.4) 4.023,0.327 4.83,0.327 4.907,0.25 XMC4500.91@6.05,0.25 ; JTAG.4@1.21,17.96 2.227,17.96 3.304,16.883 4.196,16.883 4.827,17.514 4.827,18.615 5.181,18.969 6.531,18.969 9.265,16.235 9.265,3.799 8.743,3.277 v1(8.743,3.25)
  Bottom Layer w0.254: v1(-15.305,-11.035) -15.305,-11.005 -12.27,-7.97 -12.27,-3.715 v1(-11.035,-2.48) ; v1(-8.78,3.09) -7.86,4.01 -2.305,4.01 v1(-2.275,3.98) ; v1(3.95,0.4) 4.023,0.473 4.023,1.38 4.42,1.777 7.885,1.777 8.073,1.965 8.073,2.58 v1(8.743,3.25)
NetL3_TDA1_1: L3_TDA1.1 TDA5340_TDA1.25 | length 6.8
  Top Layer w0.4: TDA5340_TDA1.25@2.455,52.515 3.78,52.515
  Top Layer w0.5: L3_TDA1.1@3.15,57.73 3.15,56.28 3.78,55.65 3.78,52.515
NetL3_TDA2_1: L3_TDA2.1 TDA5340_TDA2.25 | length 6.8
  Top Layer w0.4: TDA5340_TDA2.25@45.4,26.31 46.063,25.162
  Top Layer w0.5: 46.063,25.162 48.778,26.73 49.008,27.59 L3_TDA2.1@50.264,28.315
NetL3_TDA3_1: L3_TDA3.1 TDA5340_TDA3.25 | length 6.8
  Top Layer w0.4: 42.232,-31.693 TDA5340_TDA3.25@42.895,-30.545
  Top Layer w0.5: 42.232,-31.693 44.947,-33.26 45.808,-33.03 L3_TDA3.1@47.064,-33.755
NetL3_TDA4_1: L3_TDA4.1 TDA5340_TDA4.25 | length 6.8
  Top Layer w0.4: -3.82,-52.565 TDA5340_TDA4.25@-2.495,-52.565
  Top Layer w0.5: -3.82,-52.565 -3.82,-55.7 -3.19,-56.33 L3_TDA4.1@-3.19,-57.78
NetL3_TDA5_1: L3_TDA5.1 TDA5340_TDA5.25 | length 6.8
  Top Layer w0.4: -46.062,-25.143 TDA5340_TDA5.25@-45.4,-26.291
  Top Layer w0.5: L3_TDA5.1@-50.264,-28.297 -49.008,-27.572 -48.777,-26.711 -46.062,-25.143
NetL3_TDA6_1: L3_TDA6.1 TDA5340_TDA6.25 | length 6.8
  Top Layer w0.4: TDA5340_TDA6.25@-43.115,30.465 -42.452,31.613
  Top Layer w0.5: L3_TDA6.1@-47.284,33.675 -46.028,32.95 -45.167,33.18 -42.452,31.613
NetL201_2: L201.2 T1.8 | length 6.3
  Top Layer w0.254: T1.8@15.65,4.46 T1.8@15.51,4.32 16.49,5.3 L201.2@16.49,10.01
NetPower_1: Power.1 R11.1 | length 1.9
  Top Layer w0.254: Power.1@-10.115,27.365 -8.83,27.365 R11.1@-8.42,27.775
NetR10_1: R10.1 XMC4500.88 | length 2
  Top Layer w0.254: XMC4500.88@6.05,-1.25 7.75,-1.25 R10.1@7.95,-1.05
NetR12_1: R12.1 XMC4500.15 | length 3.9
  Top Layer w0.254: R12.1@-19,1.75 XMC4500.15@-15.15,1.75
NetR13_1: R13.1 XMC4500.16 | length 5.4
  Top Layer w0.254: R13.1@-20.25,1.25 -20.25,1.073 -18.415,1.073 -18.238,1.25 XMC4500.16@-15.15,1.25
NetR200_1: R200.1 T1.9 | length 29.4
  Top Layer w0.254: R200.1@23.43,9.99 23.43,7.41 22.448,6.428 22.448,4.492 23.302,3.638 25.209,3.638 26.703,5.132 26.703,6.646 27.334,7.277 28.226,7.277 28.857,6.646 28.857,5.123 27.95,4.216 27.95,-2.075 29.3,-3.425 T1.9@29.3,-6.45
NetR201_1: R201.1 T1.12 | length 14.7
  Top Layer w0.254: R201.1@19.26,9.99 19.26,9.011 19.79,8.481 19.79,6.508 23.114,3.184 25.397,3.184 27.157,4.944 27.157,5.577 T1.12@27.78,6.2
NetS?_1: 
NetS?_2: 
NetS?_3: 
NetS?_4: 
P_ON1: H1_TDA1.3 H2_TDA1.3 TDA5340_TDA1.13 XMC4500.144 | length 51.4
  Top Layer w0.254: XMC4500.144@-13.3,10.6 -13.3,12.56 v1(-12.85,13.01) ; v1(-3.42,44.64) -3.739,44.959 -3.739,45.459 -4.125,45.459 -4.451,45.785 -4.451,46.245 -4.031,46.665 TDA5340_TDA1.13@-3.295,46.665
  Bottom Layer w0.254: v1(-12.85,13.01) -12.674,13.01 -12.624,13.06 -12.624,13.23 -11.32,14.535 -7.8,14.535 -7.462,14.873 -7.462,24.522 -6.225,25.759 -3.401,25.759 -2.98,26.18 -2.98,28.581 -1.849,29.712 -1.849,30.648 -2.98,31.779 H2_TDA1.3@-2.98,34.64 -2.98,35.581 -4.111,36.712 -4.111,37.648 -3.448,38.311 -2.249,38.311 -2.12,38.44 -2.12,38.94 -5.32,42.14 -5.32,43.84 -4.52,44.64 v1@-3.42,44.64
P_ON2: H1_TDA2.3 H2_TDA2.3 TDA5340_TDA2.13 XMC4500.113 | length 54.6
  Top Layer w0.254: XMC4500.113@2.177,10.623 XMC4500.113@2.2,10.6 2.2,12.99 3.22,14.01 v1(3.22,14.23) ; v1(35.643,27.46) 35.759,27.896 36.193,28.146 35.999,28.48 36.119,28.925 36.517,29.156 37.091,29.002 TDA5340_TDA2.13@37.459,28.364
  Bottom Layer w0.254: v1(3.22,14.23) 3.283,14.167 5.057,14.167 5.882,13.342 21.427,13.342 21.94,13.855 21.94,15.327 21.333,15.933 21.333,18.691 21.955,19.049 23.5,18.635 24.311,19.104 24.554,20.009 24.725,20.649 H2_TDA2.3@27.202,22.079 27.547,22.079 28.017,22.549 28.431,24.094 29.242,24.563 30.147,24.32 30.747,23.282 30.923,23.234 31.356,23.484 32.528,27.856 34,28.706 35.093,28.413 v1(35.643,27.46)
P_ON3: H1_TDA3.3 H2_TDA3.3 TDA5340_TDA3.13 XMC4500.79 | length 50.8
  Top Layer w0.254: XMC4500.79@6.05,-5.75 11.027,-5.75 13.953,-8.676 13.953,-9.314 15.381,-10.742 15.381,-11.211 v1(15.61,-11.44) ; v1(20.47,-14.92) 21.71,-13.68 v1(22.04,-13.68) ; v1(39.012,-21.52) 39.448,-21.403 39.881,-21.653 40.074,-21.319 40.519,-21.199 40.918,-21.43 41.072,-22.003 TDA5340_TDA3.13@40.704,-22.641
  Bottom Layer w0.254: v1(15.61,-11.44) 15.61,-11.775 15.751,-11.916 15.751,-13.565 17.333,-15.147 20.243,-15.147 v1(20.47,-14.92) ; v1(22.04,-13.68) 22.319,-13.401 H1_TDA3.3@24.07,-13.401 24.885,-13.871 25.298,-15.416 26.11,-15.885 27.015,-15.642 27.655,-15.471 H2_TDA3.3@30.132,-16.901 30.602,-17.371 30.947,-17.371 32.492,-16.957 33.303,-17.426 33.546,-18.331 32.946,-19.369 32.993,-19.546 33.426,-19.796 37.797,-18.624 39.27,-19.474 39.562,-20.567 v1(39.012,-21.52)
P_ON4: H1_TDA4.3 H2_TDA4.3 TDA5340_TDA4.13 XMC4500.80 | length 61.8
  Top Layer w0.254: v1(-4.25,-6.25) -4.017,-6.017 -4,-6.017 -3.433,-5.45 -0.084,-5.45 0.116,-5.25 XMC4500.80@6.05,-5.25 ; TDA5340_TDA4.13@3.255,-46.715 3.991,-46.715 4.411,-46.295 4.411,-45.835 4.085,-45.509 3.699,-45.509 3.699,-45.009 v1(3.38,-44.69)
  Bottom Layer w0.254: v1(-4.25,-6.25) -4.04,-6.46 -4.04,-7.983 -4.047,-7.99 -4.047,-8.55 -4.04,-8.557 -4.04,-10.646 -4.45,-11.056 -4.45,-20.3 0.85,-25.6 0.85,-26.541 2.94,-28.631 1.809,-29.762 1.809,-30.698 2.94,-31.829 2.94,-35.631 4.071,-36.762 4.071,-37.698 3.408,-38.361 2.209,-38.361 2.08,-38.49 2.08,-38.99 5.28,-42.19 5.28,-43.89 4.48,-44.69 v1(3.38,-44.69)
P_ON5: H1_TDA5.3 H2_TDA5.3 TDA5340_TDA5.13 XMC4500.14 | length 51.5
  Top Layer w0.254: TDA5340_TDA5.13@-37.459,-28.346 -37.09,-28.983 -36.517,-29.137 -36.118,-28.907 -35.999,-28.462 -36.192,-28.127 -35.759,-27.877 v1(-35.642,-27.441) ; v1(-17.8,2.43) -17.8,2.296 -17.754,2.25 XMC4500.14@-15.15,2.25
  Bottom Layer w0.254: v1(-35.642,-27.441) -35.092,-28.394 -34,-28.687 -32.527,-27.837 -31.356,-23.466 -30.923,-23.216 -30.747,-23.263 -30.147,-24.302 -29.242,-24.544 -28.431,-24.076 -28.017,-22.531 -27.672,-22.531 H2_TDA5.3@-27.202,-22.06 -24.725,-20.63 -24.553,-19.99 -24.311,-19.085 -23.499,-18.617 -21.955,-19.031 H1_TDA5.3@-21.14,-18.56 -21.14,-0.986 -17.8,2.354 v1(-17.8,2.43)
P_ON6: H1_TDA6.3 H2_TDA6.3 TDA5340_TDA6.13 XMC4500.4 | length 39.3
  Top Layer w0.254: TDA5340_TDA6.13@-40.924,22.561 -41.292,21.923 -41.138,21.35 -40.739,21.119 -40.294,21.239 -40.101,21.573 -39.668,21.323 v1(-39.232,21.44) ; v1(-17.93,6.89) -17.93,7 -17.607,7 -17.5,6.893 -16.757,6.893 -16.423,7.227 -15.173,7.227 XMC4500.4@-15.15,7.25
  Bottom Layer w0.254: v1(-39.232,21.44) -39.782,20.487 -39.49,19.394 -38.017,18.544 -33.646,19.716 -33.213,19.466 -33.166,19.289 -33.766,18.251 -33.523,17.346 -32.712,16.877 -31.167,17.291 -30.822,17.291 H2_TDA6.3@-30.352,16.821 -27.875,15.391 -26.33,15.805 -25.518,15.336 -25.105,13.791 H1_TDA6.3@-24.29,13.321 -24.29,11.84 -24,11.55 -22.866,11.55 -18.435,7.119 -18.159,7.119 v1(-17.93,6.89)
PP0_TDA1: H1_TDA1.9 H2_TDA1.9 TDA5340_TDA1.10 XMC4500.141 | length 60
  Top Layer w0.254: XMC4500.141@-11.8,10.6 -11.777,10.623 -11.777,11.473 -11.498,11.752 -11.218,11.752 v1(-10.02,12.95) ; v1(-5.82,47.84) -5.012,47.84 -4.237,48.615 TDA5340_TDA1.10@-3.295,48.615
  Bottom Layer w0.254: v1(-10.02,12.95) -9.797,13.173 -7.236,13.173 -6.1,14.309 -6.1,23.957 -5.66,24.397 -1.934,24.397 -1.15,23.613 0.74,23.613 4.64,27.513 H1_TDA1.9@4.64,27.64 4.64,28.582 5.771,29.713 5.771,30.648 4.64,31.779 H2_TDA1.9@4.64,34.64 ; v1(-5.82,47.84) -5.183,47.84 -2.604,45.261 -2.604,41.662 0.747,38.311 2.568,38.311 3.231,37.648 3.231,35.827 H2_TDA1.9@4.418,34.64
PP0_TDA2: H1_TDA2.9 H2_TDA2.9 TDA5340_TDA2.10 XMC4500.110 | length 52.3
  Top Layer w0.254: XMC4500.110@3.7,10.6 3.7,11.91 3.82,12.03 v1(4.93,12.03) ; v1(37.214,31.139) 37.618,30.439 38.677,30.155 TDA5340_TDA2.10@39.148,29.339
  Bottom Layer w0.254: v1(4.93,12.03) 4.98,11.98 H1_TDA2.9@24.95,11.98 25.765,12.45 27.31,12.036 28.121,12.505 28.364,13.41 28.535,14.05 H2_TDA2.9@31.012,15.48 ; H2_TDA2.9@30.901,15.672 31.336,17.294 32.913,18.204 33.156,19.109 32.245,20.687 33.472,25.264 36.588,27.064 37.532,30.587 v1(37.214,31.139)
PP0_TDA3: H1_TDA3.9 H2_TDA3.9 TDA5340_TDA3.10 XMC4500.77 | length 50.8
  Top Layer w0.254: XMC4500.77@6.05,-6.75 9.462,-6.75 13.527,-10.815 13.527,-12.167 v1(13.72,-12.36) ; TDA5340_TDA3.10@42.392,-23.616 42.863,-22.8 42.579,-21.741 v1(42.984,-21.041)
  Bottom Layer w0.254: v1(13.72,-12.36) 13.79,-12.43 13.79,-13.53 H1_TDA3.9@20.26,-20 21.075,-20.47 21.488,-22.015 22.3,-22.484 23.205,-22.241 23.845,-22.07 H2_TDA3.9@26.322,-23.5 ; H2_TDA3.9@26.433,-23.308 28.055,-22.873 29.632,-23.784 30.537,-23.542 31.448,-21.964 36.025,-20.737 39.142,-22.537 42.665,-21.593 v1(42.984,-21.041)
PP0_TDA4: H1_TDA4.9 H2_TDA4.9 TDA5340_TDA4.10 XMC4500.83 | length 64.8
  Top Layer w0.254: v1(-4.4,-4.43) -4.29,-4.54 -1.1,-4.54 -0.333,-3.773 6.027,-3.773 XMC4500.83@6.05,-3.75 ; TDA5340_TDA4.10@3.255,-48.665 4.197,-48.665 4.972,-47.89 v1(5.78,-47.89)
  Bottom Layer w0.254: H2_TDA4.9@-4.68,-34.69 -4.68,-31.829 -5.811,-30.698 -5.811,-29.762 -4.68,-28.631 H1_TDA4.9@-4.68,-27.69 -4.68,-21.996 -5.865,-20.811 -5.865,-5.968 -4.4,-4.503 v1(-4.4,-4.43) ; H2_TDA4.9@-4.458,-34.69 -3.271,-35.877 -3.271,-37.698 -2.608,-38.361 -0.787,-38.361 2.564,-41.712 2.564,-45.311 5.143,-47.89 v1(5.78,-47.89)
PP0_TDA5: H1_TDA5.9 H2_TDA5.9 TDA5340_TDA5.10 XMC4500.11 | length 55.3
  Top Layer w0.254: TDA5340_TDA5.10@-39.147,-29.321 -38.677,-30.136 -37.618,-30.42 v1(-37.214,-31.12) ; XMC4500.11@-15.15,3.75 v1(-13.67,3.75)
  Bottom Layer w0.254: v1(-37.214,-31.12) -37.532,-30.568 -36.588,-27.045 -33.471,-25.246 -32.245,-20.668 -33.156,-19.091 -32.913,-18.186 -31.336,-17.275 H2_TDA5.9@-30.901,-15.654 ; H2_TDA5.9@-31.012,-15.461 -28.535,-14.031 -28.363,-13.391 -28.121,-12.486 -27.309,-12.017 -25.765,-12.431 H1_TDA5.9@-24.95,-11.961 -22.502,-9.513 -22.502,-0.422 -19.498,2.582 -19.498,3.431 -18.468,4.461 -16.944,4.461 -16.253,3.77 -13.69,3.77 v1(-13.67,3.75)
PP0_TDA6: H1_TDA6.9 H2_TDA6.9 TDA5340_TDA6.10 XMC4500.1 | length 46.8
  Top Layer w0.254: v1(-43.204,20.961) -42.799,21.661 -43.083,22.72 TDA5340_TDA6.10@-42.612,23.536 ; v1(-16.4,8.93) -16.22,8.75 XMC4500.1@-15.15,8.75
  Bottom Layer w0.254: v1(-43.204,20.961) -42.885,21.513 -39.362,22.457 -36.245,20.657 -31.668,21.884 -30.757,23.461 -29.852,23.704 -28.275,22.793 H2_TDA6.9@-26.653,23.228 ; H2_TDA6.9@-26.542,23.42 -24.065,21.99 -23.425,22.161 -22.52,22.404 -21.708,21.935 -21.295,20.39 H1_TDA6.9@-20.48,19.92 -21.304,19.096 -21.304,18.797 -20.673,18.166 -20.673,17.274 -21.489,16.458 -21.489,14.886 -22.285,14.09 -22.285,12.895 -18.32,8.93 v1(-16.4,8.93)